# Altium PCB MainPCB.PcbDoc
Units mm, origin at the board's own origin, x right, y up, seen from the top; angles counter-clockwise.
Board outline 55 x 55 mm, 2 copper layers (Top Layer, Bottom Layer); 62 components, 50 nets, 291 pads, 0 vias.
Unrouted connection lines stored in the file: 44.
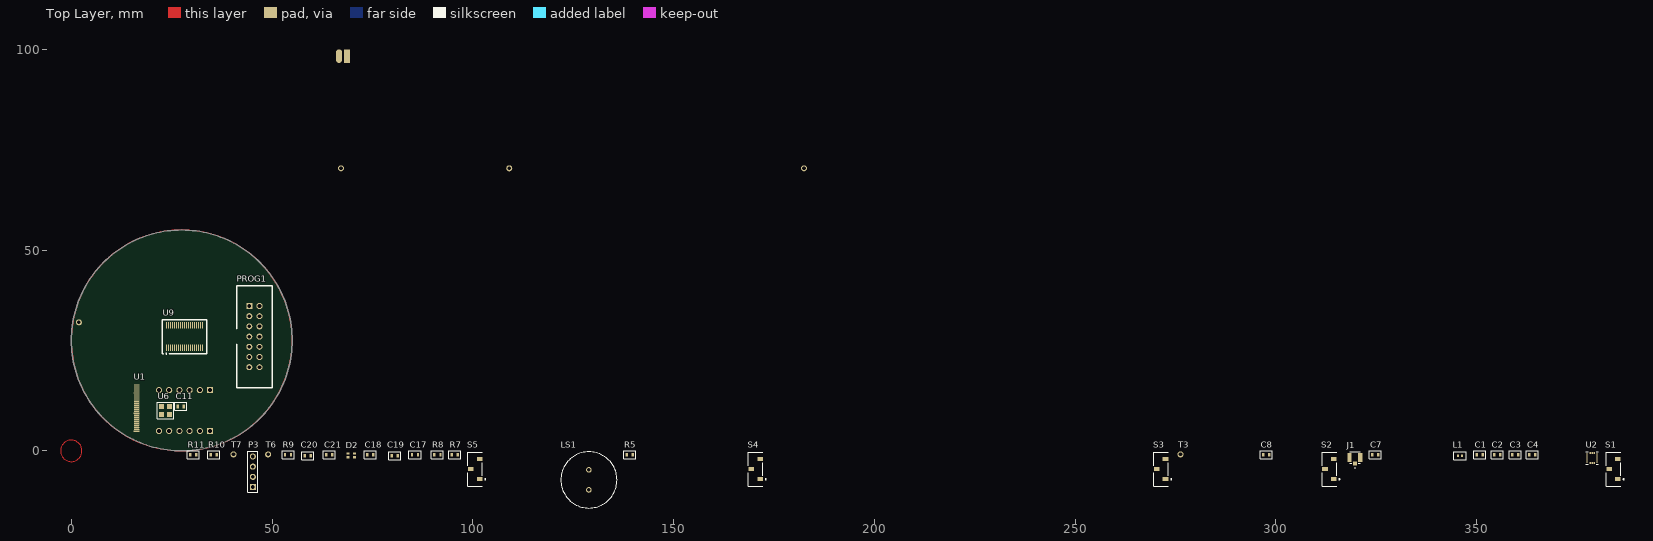
[diagram p0: Top Layer view]
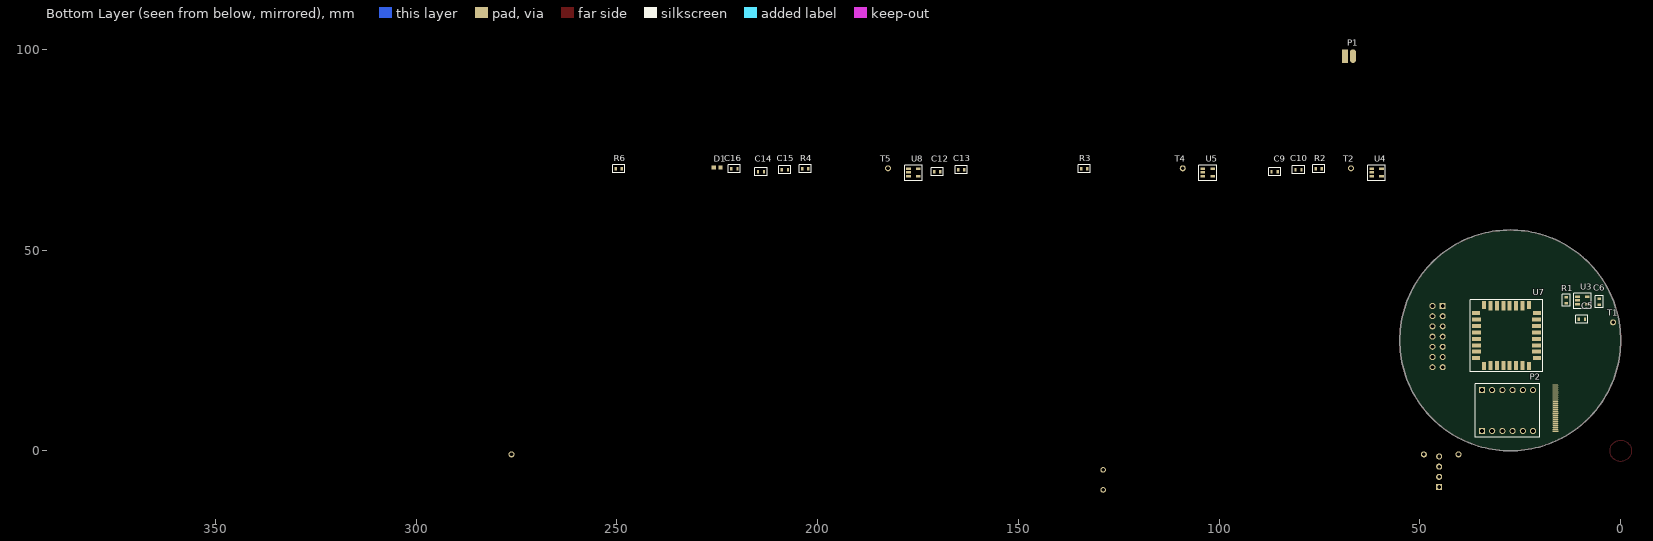
[diagram p1: Bottom Layer view, seen from below]

## Layer stack, top to bottom
Top Solder: solder mask 0.0102, Solder Resist, Dk 3.5
Top Layer: signal copper 0.0356
Dielectric 1: dielectric 0.32, FR-4, Dk 4.8
Bottom Layer: signal copper 0.0356
Bottom Solder: solder mask 0.0102, Solder Resist, Dk 3.5

## Board outline
27.5,0 cw(c27.5,27.5) 0,27.5 cw(c27.5,27.5) 27.5,55 cw(c27.5,27.5) 55,27.5 cw(c27.5,27.5)

## Design rules (kind name [scope] priority, off if disabled: settings)
Clearance [All] p1: gap=0.152 ignorepadtopadclearanceinfootprint=FALSE except(0.178: SMDPad-Poly)
HoleSize [All] p1: absolutevalues=TRUE maxlimit=5 minlimit=0.3 maxpercent=80.000 minpercent=20.000
MinimumSolderMaskSliver [All] p1: minsoldermaskwidth=0.05
PolygonConnect [All] p1: connectstyle=Relief reliefconductorwidth=0.254 reliefentries=4 polygonreliefangle="90 Angle" airgapwidth=0.254
RoutingVias [All] p1: holewidth=0.711 width=1.27 viastyle="Through Hole" minholewidth=0.711 minwidth=1.27 maxholewidth=0.711 maxwidth=1.27
SolderMaskExpansion [All] p1: expansion=0.102 istentingtop=FALSE
Width [All] p1: maxlimit=2.54 minlimit=0.152 preferedwidth=0.152 minimp=50.000000 maximp=50.000000 favimp=50.000000
28 further rules are at their usual default settings.

## Components (designator, comment, footprint, x,y, rotation, side; value= is the part's Value field where it differs from the comment)
C1 "C-n-010.000-5-0603" "0603 (Capacitor)" 350.774,-1.016 r0 top value=10nF
C2 "C-n-001.000-5-0603" "0603 (Capacitor)" 355.092,-1.016 r0 top value=1uF
C3 "C-n-001.000-5-0603" "0603 (Capacitor)" 359.537,-1.016 r0 top value=2.2uF
C4 "C-p-012.000-2-0603" "0603 (Capacitor)" 363.855,-1.016 r0 top value=27pF
C5 "C-n-001.000-5-0603" "0603 (Capacitor)" 9.652,32.766 r0 bottom value=22nF
C6 "C-n-001.000-5-0603" "0603 (Capacitor)" 5.334,37.084 r270 bottom value=1uF
C7 "C-n-010.000-5-0603" "0603 (Capacitor)" 324.739,-1.016 r0 top value=0.47uF
C8 "C-p-012.000-2-0603" "0603 (Capacitor)" 297.561,-1.016 r0 top value=27pF
C9 "C-n-001.000-5-0603" "0603 (Capacitor)" 86.207,69.469 r180 bottom value=22nF
C10 "C-n-001.000-5-0603" "0603 (Capacitor)" 80.238,69.977 r180 bottom value=1uF
C11 "C-n-010.000-5-0603" "0603 (Capacitor)" 27.305,11.049 r0 top value=10nF
C12 "C-n-001.000-5-0603" "0603 (Capacitor)" 170.154,69.469 r180 bottom value=22nF
C13 "C-n-001.000-5-0603" "0603 (Capacitor)" 164.185,69.977 r180 bottom value=1uF
C14 "C-n-001.000-5-0603" "0603 (Capacitor)" 214.096,69.469 r180 bottom value=22nF
C15 "C-n-001.000-5-0603" "0603 (Capacitor)" 208.127,69.977 r180 bottom value=1uF
C16 "C-n-001.000-5-0603" "0603 (Capacitor)" 220.7,70.231 r180 bottom value=1uF
C17 "C-n-002.200-5-0603" "0603 (Capacitor)" 85.598,-1.016 r0 top value=2.2nF
C18 "C-n-010.000-5-0603" "0603 (Capacitor)" 74.422,-1.016 r0 top value=2.2uF
C19 "C-n-001.000-5-0603" "0603 (Capacitor)" 80.518,-1.27 r0 top value=0.1uF
C20 "C-n-001.000-5-0603" "0603 (Capacitor)" 58.928,-1.27 r0 top value=10uF
C21 "C-n-100.000-10-0603" "0603 (Capacitor)" 64.262,-1.016 r0 top value=100nF
D1 "LTST-C194TBKT" 0603 225.018,70.612 r180 bottom
D2 "EAST1616RGBB4" "EAST1616RGBB4 - duplicate1" 69.723,-1.143 r0 top
J1 "CONUFL001-SMD-T" "Antenna- CONUFL001-SMD-T" 319.659,-1.651 r0 top
L1 "L-n-027.000-5-0402" "0402 (Inductor)" 345.821,-1.27 r0 top value=35.5nH
LS1 "PS1440P02BT" BUZZER_PS1440P02BT 128.905,-7.239 r0 top
P1 "Header 2" "Battery Connector- 620102131822" 68.681,98.298 r180 bottom
P2 "Logic Level Converter" CONV_BOB-12009 28.194,10.033 r90 bottom
P3 "SD Breakout" HDR1X4 45.212,-9.017 r90 top
PROG1 "MSP430 Programming Header" "TE 2-1761603-5" 45.593,28.448 r90 top
R1 "R-k-100.000-1-0603" "0603 (Resistor)" 13.589,37.465 r90 bottom value=100k
R2 "R-k-100.000-1-0603" "0603 (Resistor)" 75.158,70.231 r180 bottom value=100k
R3 "R-k-100.000-1-0603" "0603 (Resistor)" 133.578,70.231 r180 bottom value=100k
R4 "R-k-100.000-1-0603" "0603 (Resistor)" 203.047,70.231 r180 bottom value=100k
R5 "R-k-100.000-1-0603" "0603 (Resistor)" 139.065,-1.016 r0 top value=100k
R6 "R-k-001.500-1-0603" "0603 (Resistor)" 249.529,70.231 r180 bottom value=226
R7 "R-k-047.000-1-0603" "0603 (Resistor)" 95.504,-1.016 r0 top value=47k
R8 "R-k-010.000-1-0603" "0603 (Resistor)" 91.186,-1.016 r0 top value=10k
R9 "R-k-001.500-1-0603" "0603 (Resistor)" 53.975,-1.016 r0 top value=226
R10 "R-k-010.000-1-0603" "0603 (Resistor)" 35.433,-1.016 r0 top value=10k
R11 "R-k-010.000-1-0603" "0603 (Resistor)" 30.353,-1.016 r0 top value=10k
S1 "JS102011JCQN" SW_JS102011JCQN 384.048,-4.572 r90 top
S2 "JS102011JCQN" SW_JS102011JCQN 313.309,-4.572 r90 top
S3 "JS102011JCQN" SW_JS102011JCQN 271.399,-4.572 r90 top
S4 "JS102011JCQN" SW_JS102011JCQN 170.434,-4.572 r90 top
S5 "JS102011JCQN" SW_JS102011JCQN 100.584,-4.572 r90 top
T1 "Open Pad" "Open Pad" 1.905,32.004 r180 bottom
T2 "Open Pad" "Open Pad" 67.157,70.358 r180 bottom
T3 "Open Pad" "Open Pad" 276.225,-0.889 r0 top
T4 "Open Pad" "Open Pad" 109.067,70.358 r180 bottom
T5 "Open Pad" "Open Pad" 182.473,70.358 r180 bottom
T6 "Open Pad" "Open Pad" 49.022,-0.889 r0 top
T7 "Open Pad" "Open Pad" 40.386,-0.889 r0 top
U1 "Camera" SFV24R-2STE1HLF 16.256,4.874 r90 top
U2 "ICM-20608-G" ICM-20608-G 378.714,-1.778 r0 top
U3 "RT9193-33GB" RT9193-33GB 9.525,37.465 r180 bottom
U4 "RT9193-30GB" RT9193-33GB 60.807,69.342 r180 bottom
U5 "RT9193-28GB" RT9193-33GB 102.844,69.342 r180 bottom
U6 "MS5837-02BA21" MS5837-30BA 24.479,11.049 r0 top
U7 "SE878K3-A" "GNSS Module" 28.436,28.682 r180 bottom
U8 "RT9193-18GB" RT9193-33GB 176.123,69.342 r180 bottom
U9 "MSP430FR2355 38-TFSOP" "MSP430FR2355 38-TFSOP" 28.194,28.448 r0 top

## Footprints (in the part's own frame and the unit in brackets; to place one, negate y for a bottom-side part, rotate by r counter-clockwise, add the part's x,y. Pads: shape width x height; smd on the part's side, far side on the other; paste and mask are expansions set on the pad)
"0402 (Inductor)" [mm]
  rect 0.5x0.6 smd mask+0.05: 1(-0.5,0) 2(0.5,0)
  silkscreen extent -1.5,-1 1.5,1, body extent -0.5,-0.25 0.5,0.25, height 0.35
0603 [mm]
  rect 1.1x1 smd: 1(-0.85,0) 2(0.85,0)
"0603 (Capacitor)" [mm]
  rect 0.6x0.9 smd mask+0.05: 1(-0.75,0) 2(0.75,0)
  silkscreen extent -1.5,-1 1.5,1, body extent -0.77,-0.42 0.78,0.43, height 0.45
"0603 (Resistor)" [mm]
  rect 0.6x0.9 smd mask+0.05: 1(-0.75,0) 2(0.75,0)
  silkscreen extent -1.5,-1 1.5,1, body extent -0.77,-0.42 0.78,0.43, height 0.45
"Antenna- CONUFL001-SMD-T" [mm]
  rect 1x1.05 smd: 1(0,-1.525)
  rect 1.05x2.2 smd: 2(-1.325,0) 3(1.325,0)
  silkscreen extent -1.3,-2.7 1.3,1.42
"Battery Connector- 620102131822" [mm]
  rect 1.5x3.4 smd: A1(0,0)
  oval 1.5x3.4 smd: A2(2,0)
  rect 1.5x3.4 smd far side: B1(0,0)
  oval 1.5x3.4 smd far side: B2(2,0)
BUZZER_PS1440P02BT [mm]
  round 1.398 hole 0.89: 1(0,2.5) 2(0,-2.5)
  silkscreen extent -7,-7 7,7
CONV_BOB-12009 [mil]
  round 60 hole 40: 1(-200,50) 2(200,50) 3(200,-50) 4(-200,-50) 5(200,-250) 6(-200,-250) 7(200,-150) 8(-200,-150) 9(200,150) 10(-200,150)
  rect 60x60 hole 40: 11(200,250) 12(-200,250)
  silkscreen extent -262,-316 262,316
"EAST1616RGBB4 - duplicate1" [mm]
  rect 0.8x0.55 smd: 1(-0.8,0.45) 2(-0.8,-0.45) 3(0.8,-0.45) 4(0.8,0.45)
"GNSS Module" [mm]
  rect 2x1 smd mask+0.1: 1(-7.6,5.6) 8(-7.6,-5.6) 17(7.6,-5.6) 24(7.6,5.6)
  rect 2.3x1 smd mask+0.1: 2(-7.45,4) 3(-7.45,2.4) 4(-7.45,0.8) 5(-7.45,-0.8) 6(-7.45,-2.4) 7(-7.45,-4) 18(7.45,-4) 19(7.45,-2.4) 20(7.45,-0.8) 21(7.45,0.8) 22(7.45,2.4) 23(7.45,4)
  rect 1x2 smd mask+0.1: 9(-5.6,-7.6) 16(5.6,-7.6) 25(5.6,7.6) 32(-5.6,7.6)
  rect 1x2.3 smd mask+0.1: 10(-4,-7.45) 11(-2.4,-7.45) 12(-0.8,-7.45) 13(0.8,-7.45) 14(2.4,-7.45) 15(4,-7.45) 26(4,7.45) 27(2.4,7.45) 28(0.8,7.45) 29(-0.8,7.45) 30(-2.4,7.45) 31(-4,7.45)
  silkscreen extent -9,-9 9,9, body extent -9,-9 9,9, height 6.2
HDR1X4 [mm] "Connector; Header; 4 Position"
  rect 1.5x1.5 hole 0.9: 1(0,0)
  round 1.5 hole 0.9: 2(2.54,0) 3(5.08,0) 4(7.62,0)
  silkscreen extent -1.27,-1.27 8.89,1.27
ICM-20608-G [mm]
  rect 0.49x0.35 smd: 1(-1.26,1) 2(-1.26,0.5) 3(-1.26,0) 4(-1.26,-0.5) 5(-1.26,-1) 9(1.26,-1) 10(1.26,-0.5) 11(1.26,0) 12(1.26,0.5)
  rect 0.35x0.49 smd: 6(-0.5,-1.26) 7(0,-1.26) 8(0.5,-1.26) 14(0.5,1.26) 15(0,1.26) 16(-0.5,1.26)
  rect 0.49x0.3 smd: 13(1.26,1)
  silkscreen extent -1.55,-1.55 1.55,1.55, body extent -1.5,-1.5 1.5,1.5, height 0.8
MS5837-30BA [mm]
  rect 1.3x1.3 smd: 1(0,-2) 2(0,0) 3(-2,0) 4(-2,-2)
  silkscreen extent -3.1,-3.1 1,1
"MSP430FR2355 38-TFSOP" [mm]
  rect 0.3x1.6 smd paste-0.025 mask+0.05: 1(-4.5,-2.8) 2(-4,-2.8) 3(-3.5,-2.8) 4(-3,-2.8) 5(-2.5,-2.8) 6(-2,-2.8) 7(-1.5,-2.8) 8(-1,-2.8) 9(-0.5,-2.8) 10(0,-2.8) 11(0.5,-2.8) 12(1,-2.8) 13(1.5,-2.8) 14(2,-2.8) 15(2.5,-2.8) 16(3,-2.8) 17(3.5,-2.8) 18(4,-2.8) 19(4.5,-2.8) 20(4.5,2.8) 21(4,2.8) 22(3.5,2.8) 23(3,2.8) 24(2.5,2.8) 25(2,2.8) 26(1.5,2.8) 27(1,2.8) 28(0.5,2.8) 29(0,2.8) 30(-0.5,2.8) 31(-1,2.8) 32(-1.5,2.8) 33(-2,2.8) 34(-2.5,2.8) 35(-3,2.8) 36(-3.5,2.8) 37(-4,2.8) 38(-4.5,2.8)
  silkscreen extent -5.5,-4.37 5.5,4.25, body extent -4.9,-2.2 4.9,2.2, height 1.2
"Open Pad" [mm]
  round 1.5 hole 0.9: 1(0,0)
RT9193-33GB [mm]
  rrect12% 1.17x0.67 smd: 1(-1.22,0.94) 2(-1.22,0) 3(-1.22,-0.94) 4(1.22,-0.94) 5(1.22,0.94)
  silkscreen extent -2.2,-2.1 2.2,1.8
SFV24R-2STE1HLF [mm]
  rect 0.3x1.4 smd: A1(0,0) A10(4.5,0) A20(9.5,0)
  oval 0.3x1.4 smd: A2(0.5,0) A3(1,0) A4(1.5,0) A5(2,0) A6(2.5,0) A7(3,0) A8(3.5,0) A9(4,0) A11(5,0) A12(5.5,0) A13(6,0) A14(6.5,0) A15(7,0) A16(7.5,0) A17(8,0) A18(8.5,0) A19(9,0) A21(10,0) A22(10.5,0) A23(11,0) A24(11.5,0)
  rect 0.3x1.4 smd far side: B1(0,0) B10(4.5,0) B20(9.5,0)
  oval 0.3x1.4 smd far side: B2(0.5,0) B3(1,0) B4(1.5,0) B5(2,0) B6(2.5,0) B7(3,0) B8(3.5,0) B9(4,0) B11(5,0) B12(5.5,0) B13(6,0) B14(6.5,0) B15(7,0) B16(7.5,0) B17(8,0) B18(8.5,0) B19(9,0) B21(10,0) B22(10.5,0) B23(11,0) B24(11.5,0)
SW_JS102011JCQN [mm]
  rect 1x1.4 smd: 1(-2.5,-1.1) 2(0,1.1) 3(2.5,-1.1)
  silkscreen extent -4.25,-2.64 4.25,1.8
"TE 2-1761603-5" [mm] "14 Pin, 100mm, 2 Row"
  rect 1.5x1.5 hole 0.9 mask-0.1: 1(7.62,1.27)
  round 1.5 hole 0.9 mask-0.1: 2(7.62,-1.27) 3(5.08,1.27) 4(5.08,-1.27) 5(2.54,1.27) 6(2.54,-1.27) 7(0,1.27) 8(0,-1.27) 9(-2.54,1.27) 10(-2.54,-1.27) 11(-5.08,1.27) 12(-5.08,-1.27) 13(-7.62,1.27) 14(-7.62,-1.27)
  silkscreen extent -12.7,-4.45 12.7,4.45, body extent -12.7,-4.78 12.7,4.45, height 8.9

## Part data
C1 C11: "Capacitor 10nF 0603 +/-5%", Case/Package=0603, Manufacturer=Murata, Manufacturer PartNo=GRM1885C1H103JA01D, Tolerance=+/-5%
C2 C6 C10 C13 C15 C16: "Capacitor 1uF 0603 +/-5%", Case/Package=0603, Manufacturer=Murata, Manufacturer PartNo=GCM1885C2A102JA16D, Tolerance=+/-5%
C3: "Capacitor 2,2uF 0603 +/-5%", Case/Package=0603, Manufacturer=Murata, Manufacturer PartNo=GCM1885C2A102JA16D, Tolerance=+/-5%
C4 C8: "Capacitor 12pF 0603 +/-2%", Case/Package=0603, Manufacturer=Murata, Manufacturer PartNo=GQM1875C2E120GB12D, Tolerance=+/-2%
C5 C9 C12 C14: "Capacitor 22nF 0603 +/-5%", Case/Package=0603, Manufacturer=Murata, Manufacturer PartNo=GCM1885C2A102JA16D, Tolerance=+/-5%
C7: "Capacitor 0.47uF 0603 +/-5%", Case/Package=0603, Manufacturer=Murata, Manufacturer PartNo=GRM1885C1H103JA01D, Tolerance=+/-5%
C17: library part C-n-001.000-5-0603, "Capacitor 2.2nF 0603 +/-5%", Case/Package=0603, Manufacturer=Murata, Manufacturer PartNo=GCM1885C2A102JA16D, Tolerance=+/-5%
C18: "Capacitor 2.2uF 0603 +/-5%", Case/Package=0603, Manufacturer=Murata, Manufacturer PartNo=GRM1885C1H103JA01D, Tolerance=+/-5%
C19: "Capacitor 0.1uF 0603 +/-5%", Case/Package=0603, Manufacturer=Murata, Manufacturer PartNo=GCM1885C2A102JA16D, Tolerance=+/-5%
C20: "Capacitor 10uF 0603 +/-5%", Case/Package=0603, Manufacturer=Murata, Manufacturer PartNo=GCM1885C2A102JA16D, Tolerance=+/-5%
C21: "Capacitor 100nF 0603 +/-10%", Case/Package=0603, Manufacturer=Murata, Manufacturer PartNo=GRM188R72A104KA35D, Tolerance=+/-10%
D1: "Blue 468nm LED Indication - Discrete 3.3V 0603 _1608 Metric_", Package="0603 Lite-On", Digi-Key_Part_Number=160-1837-1-ND, Digi-Key_Purchase_URL=https://www.digikey.com/product-detail/en/lite-on-inc/LTST-C194TBKT/160-1837-1-ND/2356236?utm_source=snapeda&utm_medium=aggregator&utm_campaign=symbol, MF="Lite-On Inc.", MP=LTST-C194TBKT, SnapEDA_Link=https://www.snapeda.com/parts/LTST-C194TBKT/Lite-On%20Inc./view-part/426592/?ref=snap
J1: Package=None, Availability=Unavailable, MP=CONUFL001-SMD-T, Price=None
L1: "Inductor 35.5nH 0402 +/-5%", Case/Package=0402, Manufacturer=Murata, Manufacturer PartNo=LQG15HS27NJ02D, Tolerance=+/-5%
LS1: "Buzzers Transducer, Externally Driven Piezo 3V 4kHz 75dB @ 3V, 10cm Through Hole PC Pins", Package="SOP-8 TDK", Digi-Key_Part_Number=445-5242-1-ND, Digi-Key_Purchase_URL=https://www.digikey.com/product-detail/en/tdk-corporation/PS1440P02BT/445-5242-1-ND/2236832?utm_source=snapeda&utm_medium=aggregator&utm_campaign=symbol, MF=TDK, MP=PS1440P02BT, SnapEDA_Link=https://www.snapeda.com/parts/PS1440P02BT/TDK/view-part/295705/?ref=snap
P1: "Header, 2-Pin", LatestRevisionDate=17-Jul-2002, LatestRevisionNote="Re-released for DXP Platform.", Publisher="Altium Limited"
P2: library part "Header 12", "Header, 12-Pin", LatestRevisionDate=17-Jul-2002, LatestRevisionNote="Re-released for DXP Platform.", Publisher="Altium Limited"
P3: library part "Header 4", "Header, 4-Pin", LatestRevisionDate=17-Jul-2002, LatestRevisionNote="Re-released for DXP Platform.", Publisher="Altium Limited"
PROG1: "14 Pin JTAG Header for MSP430 Debug Probe", Manufacturer="TE Connectivity", Manufucturer PartNo=2-1761603-5
R1 R2 R3 R4 R5: "Resistor 100k 0603 +/-1%", Case/Package=0603, Manufacturer="Vishay Dale", Manufacturer PartNo=CRCW0603100KFKEAHP, Tolerance=+/-1%
R6 R9: "Resistor 226 0603 +/-1%", Case/Package=0603, Manufacturer="Vishay Dale", Manufacturer PartNo=CRCW06031K50FKEAHP, Tolerance=+/-1%
R7: library part R-k-068.000-1-0603, "Resistor 47k 0603 +/-1%", Case/Package=0603, Manufacturer="Vishay Dale", Manufacturer PartNo=CRCW060368K0FKEAHP, Tolerance=+/-1%
R8 R10 R11: "Resistor 10k 0603 +/-1%", Case/Package=0603, Manufacturer="Vishay Dale", Manufacturer PartNo=CRCW060310K0FKEAHP, Tolerance=+/-1%
S1 S2 S3 S4 S5: "Switch Slide Spdt 300ma 6v", Package=None, Availability=Unavailable, MP=JS102011JCQN, Price=None
U2: "Accelerometer, Gyroscope, 6 Axis Sensor IÂ²C, SPI Output", Package="LGA-16 InvenSense", Availability=Good, MF="TDK InvenSense", MP=ICM-20608-G, Price=None, Purchase-URL=https://pricing.snapeda.com/search/part/ICM-20608-G/?ref=eda, SnapEDA_Link=https://www.snapeda.com/parts/ICM-20608-G/TDK%20InvenSense/view-part/196551/?ref=snap
U3: "Linear Voltage Regulator IC 1 Output 300mA SOT-23-5", Package="SOT-23-5 Richtek", Availability=Unavailable, MF="Richtek USA", MP=RT9193-33GB, Price=None, SnapEDA_Link=https://www.snapeda.com/parts/RT9193-33GB/Richtek%20USA%20Inc./view-part/55570/?ref=snap
U4 U5 U8: library part RT9193-33GB, "Linear Voltage Regulator IC 1 Output 300mA SOT-23-5", Package="SOT-23-5 Richtek", Availability=Unavailable, MF="Richtek USA", MP=RT9193-33GB, Price=None, SnapEDA_Link=https://www.snapeda.com/parts/RT9193-33GB/Richtek%20USA%20Inc./view-part/55570/?ref=snap
U6: "Pressure Sensor, Absolute, 2Bar, I2C", Case/Package=SMD/SMT, Manufacturer="TE Connectivity", Max Operating Temperature=85°C, Min Operating Temperature=-20°C, Operating Pressure=17.4PSI, Supplier Part Number 1=223-1891-1-ND, ComponentLink1Description=https://www.te.com/commerce/DocumentDelivery/DDEController?Action=srchrtrv&amp;DocNm=MS5837-02BA01&amp;DocType=DS&amp;DocLang=English&src-supplier=Digi-Key, ComponentLink1URL=https://www.te.com/commerce/DocumentDelivery/DDEController?Action=srchrtrv&amp;DocNm=MS5837-02BA01&amp;DocType=DS&amp;DocLang=English&src-supplier=Digi-Key, Manufacturer Part Number=MS5837-02BA21, Max Pressure=145.04PSI, Output Type=I2C, Port Style="No Port", Pressure Type=Absolute, Pricing 1="1=12.98000, 5=11.38800, 10=10.24900, 25=9.11040, 50=8.42700, 100=7.28820, 500=6.83264, 1000=6.37714 (USD)", RoHS=No, RoHS Compliant=Yes, Stock 1=5173, Supplier 1=Digi-Key, Termination=SMD/SMT
U7: "GNSS L1 Antenna module (GPS, Galileo, Glonass, BeiDou)", Package="NON-STANDARD-32 Telit", Availability="Not in stock", Check_prices=https://www.snapeda.com/parts/SE878K3-A/Telit/view-part/?ref=eda, MF=Telit, MP=SE878K3-A, Price=None, SnapEDA_Link=https://www.snapeda.com/parts/SE878K3-A/Telit/view-part/?ref=snap
U9: "MSP430 Microcontroller", Manufacturer="Texas Instruments", Manufacturer Part Number=MSP430FR2355TDBTR

## Nets (pads, with @x,y where several pads share a name; then routed paths per layer and width w, separated by ;. In a path a pad name is that pad's centre, name@x,y a point inside that pad or via, vN(x,y) a via of type N, cw(c..) or ccw(c..) an arc to the next point about the centre after c; other vN are vias at no path point)
1v8: C15.1 P2.3 S1.3 T5.1 U2.5 U8.5
2v8: C13.1 P2.4 R10.2 R11.2 S2.2 T4.1 U5.5
3v0: C8.2 C10.1 C11.1 PROG1.4 R7.1 R9.2 S5.2 T2.1 U4.5 U6.2 U7.26
3v3: C4.1 C6.1 L1.1 S3.2 S4.2 T1.1 U3.5
CAM_D0: U9.14
CAM_HSYNC: U9.13
CAM_PCLK: U9.12
CAM_VSYNC: U9.15
GND: C1.2 C2.2 C3.2 C4.2 C5.2 C6.2 C7.2 C9.2 C10.2 C11.2 C12.2 C13.2 C14.2 C15.2 C16.2 C17.2 C18.2 C19.2 C20.2 C21.2 J1.2 J1.3 LS1.2 P2.1 P2.2 PROG1.9 R5.2 R6.1 U2.9 U2.10 U2.11 U2.12 U2.13 U2.15 U3.2 U4.2 U5.2 U6.1 U7.7 U7.14 U7.18 U7.22 U7.24 U7.25 U8.2 U9.11
GNSS_Receive: U7.1 U9.20
GNSS_Transmit: U7.32 U9.21
JTAG_CLK: PROG1.7 U9.31
JTAG_IN: PROG1.3 U9.29
JTAG_OUT: PROG1.1 U9.28
JTAG_RST: C17.1 PROG1.11 R7.2 U9.9
JTAG_STATE: PROG1.5 U9.30
JTAG_TEST: PROG1.8 U9.8
NetC1_1: C1.1 U2.1
NetC2_1: C2.1 C3.1 S1.2 U2.16
NetC5_1: C5.1 U3.4
NetC7_1: C7.1 U2.14
NetC8_1: C8.1 J1.1 L1.2
NetC9_1: C9.1 U4.4
NetC12_1: C12.1 U5.4
NetC14_1: C14.1 U8.4
NetC16_1: C16.1 D1.2 R1.2 R2.2 R3.2 R4.2 U3.1 U4.1 U5.1 U8.1
NetC18_1: C18.1 C19.1 S3.3 U7.10 U7.31
NetC20_1: C20.1 C21.1 S5.3 U9.10
NetD1_1: D1.1 R6.2
NetD2_1: D2.1 U9.27
NetD2_2: D2.2 U9.26
NetD2_3: D2.3 U9.25
NetD2_4: D2.4 R9.1
NetLS1_1: LS1.1 U9.37
NetP2_5: P2.5 U6.4
NetP2_7: P2.7 U6.3
NetR1_1: R1.1 U3.3
NetR2_1: R2.1 U4.3
NetR3_1: R3.1 U5.3
NetR4_1: R4.1 U8.3
NetR5_1: R5.1 S4.3 U7.3
NetR8_1: R8.1 U7.16
NetS2_3: S2.3
NetT3_1: T3.1 U7.27
SCL: P2.8 R10.1 T6.1 U2.2 U9.16
SD_CLK: P3.3 U9.6
SD_CS: P3.4 U9.7
SD_DI: P3.2 U9.5
SD_DO: P3.1 U9.4
SDA: P2.6 R11.1 T7.1 U2.3 U9.17
pads on no net: P1.A1 P1.A2 P1.B1 P1.B2 P2.9 P2.10 P2.11 P2.12 PROG1.2 PROG1.6 PROG1.10 PROG1.12 PROG1.13 PROG1.14 R8.2 S1.1 S2.1 S3.1 S4.1 S5.1 U1.A1 U1.A2 U1.A3 U1.A4 U1.A5 U1.A6 U1.A7 U1.A8 U1.A9 U1.A10 U1.A11 U1.A12 U1.A13 U1.A14 U1.A15 U1.A16 U1.A17 U1.A18 U1.A19 U1.A20 U1.A21 U1.A22 U1.A23 U1.A24 U1.B1 U1.B2 U1.B3 U1.B4 U1.B5 U1.B6 U1.B7 U1.B8 U1.B9 U1.B10 U1.B11 U1.B12 U1.B13 U1.B14 U1.B15 U1.B16 U1.B17 U1.B18 U1.B19 U1.B20 U1.B21 U1.B22 U1.B23 U1.B24 U2.4 U2.6 U2.7 U2.8 U7.2 U7.4 U7.5 U7.6 U7.8 U7.9 U7.11 U7.12 U7.13 U7.15 U7.17 U7.19 U7.20 U7.21 U7.23 U7.28 U7.29 U7.30 U9.1 U9.2 U9.3 U9.18 U9.19 U9.22 U9.23 U9.24 U9.32 U9.33 U9.34 U9.35 U9.36 U9.38
copper on no net: | length 189.5
  Top Layer w0.254: 2.667,0 ccw(c0,0) 2.667,0 ; 55,27.5 ccw(c27.5,27.5) 55,27.5